# Altium PCB ESC_GEMINI.PcbDoc (part 4 of 4)
Units mm, origin at the board's own origin, x right, y up, seen from the top; angles counter-clockwise.
Board outline 12 x 35 mm, 6 copper layers (F.Cu, In1.Cu, In2.Cu, In3.Cu, In4.Cu, B.Cu); 97 components, 64 nets, 285 pads, 618 vias.
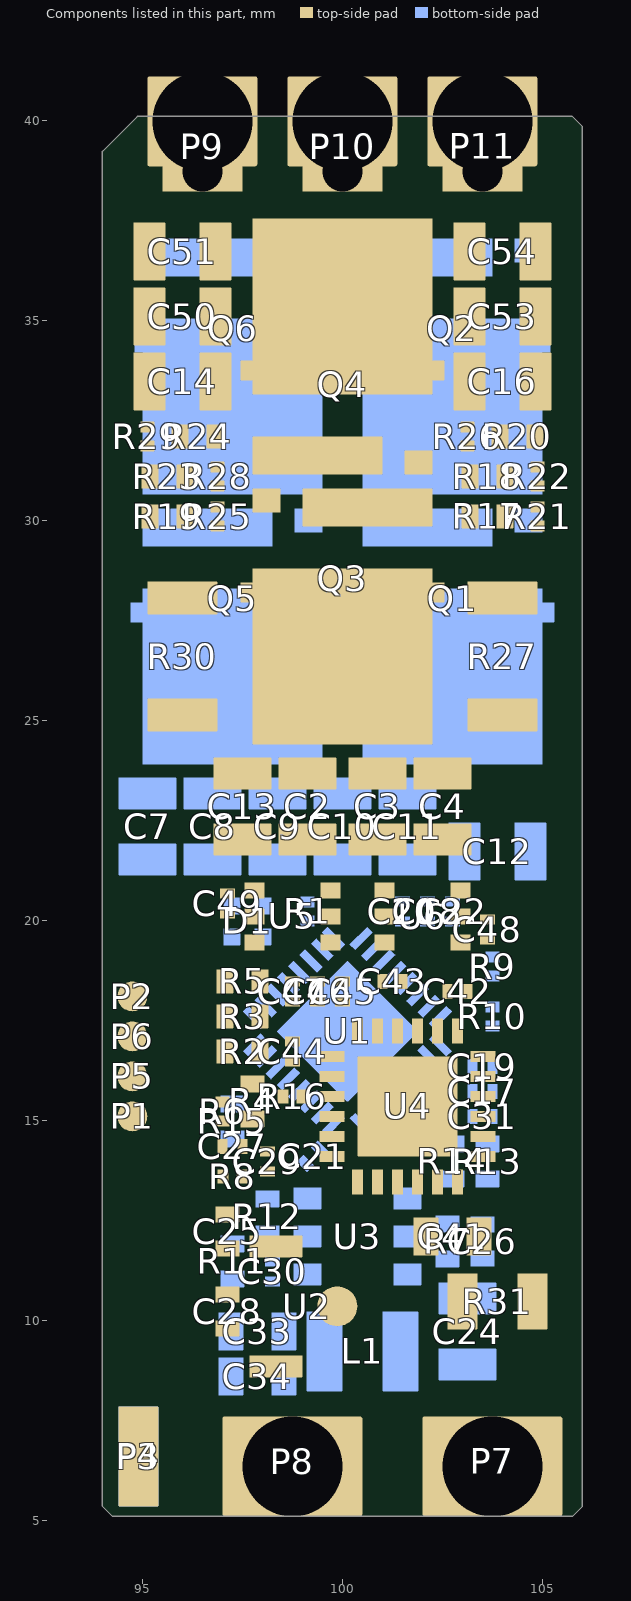
[diagram p8: the components of this part, seen from the top]

## Polygon pours and split planes (outlines as drawn) (continued)
VBUS on In3.Cu "In3.Cu-VBUS" (solid, remove dead copper, pour order 30087): 97.875,22.85 99.625,22.85 99.75,22.975 99.75,25.225 99.625,25.35 98.875,25.35 97.75,24.225 97.75,22.975
PWM_IN-N on In4.Cu "In4.Cu-/CTRL/PWM_IN-N-3" (solid, remove dead copper, pour order 30143): 99.404,16.77 99.301,16.692 99.211,16.667 99.12,16.667 99.016,16.663 98.885,16.627 98.999,16.349 99.212,16.138 99.307,16.249 99.36,16.341 99.398,16.426 99.45,16.517 99.545,16.629
VREF_U on In4.Cu "In4.Cu-/CTRL/VREF_U-3" (solid, remove dead copper, pour order 30277): 103.337,15.454 103.277,15.397 103.229,15.362 103.183,15.338 103.126,15.316 103.048,15.285 103.124,15.099 103.31,15.023 103.341,15.101 103.363,15.158 103.386,15.204 103.422,15.252 103.479,15.312
PWM_IN-N on In4.Cu "In4.Cu-/CTRL/PWM_IN-N-2" (solid, remove dead copper, pour order 30271): 102.6,17 102.683,16.997 102.742,16.989 102.791,16.973 102.847,16.949 102.923,16.915 103.001,17.1 102.923,17.285 102.847,17.251 102.791,17.227 102.742,17.211 102.683,17.203 102.6,17.2
PWM_IN-P on In4.Cu "In4.Cu-/CTRL/PWM_IN-P-1" (solid, remove dead copper, pour order 30153): 98.945,17.075 98.803,17.083 98.703,17.101 98.617,17.124 98.517,17.142 98.375,17.15 98.374,16.85 98.49,16.573 98.608,16.644 98.681,16.724 98.74,16.799 98.817,16.854 98.945,16.875
PHC on In4.Cu "In4.Cu-/CTRL/PHC-1" (solid, remove dead copper, pour order 30163): 103.55,29.975 103.549,29.877 103.544,29.807 103.532,29.747 103.51,29.681 103.473,29.59 103.75,29.474 104.027,29.59 103.99,29.681 103.968,29.747 103.956,29.807 103.951,29.877 103.95,29.975
GND_C on In4.Cu "In4.Cu-/GND_C-1" (solid, remove dead copper, pour order 30077): 103.5,35.35 103.75,35.1 103.75,33.6 104.625,32.725 105.5,32.725 105.75,32.975 105.75,36.6 105.625,36.725 103.75,36.725 103.5,36.475
SWCLK on In4.Cu "In4.Cu-/CTRL/SWCLK-1" (solid, remove dead copper, pour order 30208): 95.245,16.496 95.162,16.592 95.118,16.671 95.094,16.749 95.07,16.842 95.027,16.965 94.749,16.851 94.635,16.573 94.758,16.53 94.851,16.506 94.929,16.482 95.008,16.438 95.104,16.355
+3V3 on In4.Cu "In4.Cu-+3V3-8" (solid, remove dead copper, pour order 30158): 99,20.075 98.994,19.949 98.974,19.862 98.943,19.789 98.901,19.706 98.848,19.59 99.125,19.474 99.402,19.59 99.349,19.706 99.307,19.789 99.276,19.862 99.256,19.949 99.25,20.075
I_SNS_A on In4.Cu "In4.Cu-/CTRL/I_SNS_A-1" (solid, remove dead copper, pour order 30204): 100.37,19.621 100.287,19.717 100.243,19.796 100.219,19.874 100.195,19.967 100.152,20.09 99.874,19.976 99.76,19.698 99.883,19.655 99.976,19.631 100.054,19.607 100.133,19.563 100.229,19.48
SWDIO on In4.Cu "In4.Cu-/CTRL/SWDIO-1" (solid, remove dead copper, pour order 30200): 95.35,15.95 95.223,15.959 95.136,15.984 95.064,16.022 94.982,16.071 94.865,16.127 94.749,15.85 94.865,15.573 94.982,15.629 95.064,15.678 95.136,15.716 95.223,15.741 95.35,15.75
VREF_U on In4.Cu "In4.Cu-/CTRL/VREF_U-2" (solid, remove dead copper, pour order 30292): 103.803,17.762 103.865,17.839 103.889,17.906 103.896,17.972 103.905,18.05 103.935,18.148 103.751,18.226 103.565,18.148 103.604,18.085 103.648,18.036 103.682,17.995 103.692,17.953 103.662,17.903
I_SNS_B on In4.Cu "In4.Cu-/CTRL/I_SNS_B-1" (solid, remove dead copper, pour order 30224): 104.004,18.75 104.127,18.755 104.214,18.768 104.289,18.782 104.377,18.795 104.5,18.8 104.501,19.1 104.288,19.312 104.218,19.212 104.184,19.114 104.156,19.031 104.106,18.972 104.004,18.95
+3V3 on In4.Cu "In4.Cu-+3V3-7" (solid, remove dead copper, pour order 30250): 100.754,20.169 100.819,20.093 100.855,20.031 100.882,19.973 100.918,19.91 100.984,19.834 101.126,19.974 101.266,20.116 101.19,20.182 101.127,20.218 101.069,20.245 101.007,20.281 100.931,20.346
Net-(D1-Anode) on In4.Cu "In4.Cu-Net-(D1-Anode)-1" (solid, remove dead copper, pour order 30302): 96.9,17.827 96.903,17.74 96.909,17.678 96.916,17.624 96.922,17.563 96.925,17.475 97.125,17.474 97.266,17.616 97.213,17.662 97.167,17.693 97.131,17.722 97.108,17.763 97.1,17.827
PWM_IN-N on In4.Cu "In4.Cu-/CTRL/PWM_IN-N-1" (solid, remove dead copper, pour order 30100): 94.5,5.35 95.25,5.35 95.375,5.475 95.375,7.725 95.25,7.85 94.5,7.85 94.375,7.725 94.375,5.475
VBUS_SNS_U on In4.Cu "In4.Cu-/CTRL/VBUS_SNS_U-1" (solid, remove dead copper, pour order 30274): 102.788,15.371 102.848,15.428 102.896,15.464 102.942,15.487 102.999,15.509 103.077,15.54 103.001,15.726 102.815,15.802 102.784,15.724 102.762,15.667 102.739,15.621 102.703,15.573 102.646,15.513
PHC on In4.Cu "In4.Cu-/CTRL/PHC" (solid, remove dead copper, pour order 30122): 102,33.475 101.875,33.6 101.875,39.975 102,40.1 105.5,40.1 105.75,39.85 105.75,37.475 105.5,37.225 104,37.225 103.25,36.475 103.25,35.225 103.5,34.975 103.5,33.6 103.375,33.475
+3V3 on In4.Cu "In4.Cu-+3V3-6" (solid, remove dead copper, pour order 30244): 101.525,20.1 101.425,20.108 101.355,20.126 101.295,20.149 101.225,20.167 101.125,20.175 101.124,19.975 101.125,19.775 101.225,19.783 101.295,19.801 101.355,19.824 101.425,19.842 101.525,19.85
PWM-AP on In4.Cu "In4.Cu-/CTRL/PWM-AP" (solid, remove dead copper, pour order 30173): 98,14.9 98.098,14.899 98.168,14.894 98.228,14.882 98.294,14.86 98.385,14.823 98.501,15.1 98.385,15.377 98.294,15.34 98.228,15.318 98.168,15.306 98.098,15.301 98,15.3
PWM-AN on In4.Cu "In4.Cu-/CTRL/PWM-AN-1" (solid, remove dead copper, pour order 30259): 100.242,13.7 100.309,13.766 100.358,13.81 100.401,13.848 100.449,13.893 100.516,13.959 100.376,14.101 100.19,14.177 100.167,14.092 100.165,14.025 100.166,13.966 100.15,13.908 100.1,13.842
+3V3 on In4.Cu "In4.Cu-+3V3-5" (solid, remove dead copper, pour order 30262): 99.625,13.804 99.636,13.855 99.665,13.88 99.71,13.89 99.765,13.898 99.827,13.915 99.75,14.101 99.565,14.177 99.515,14.084 99.464,14.022 99.419,13.97 99.387,13.904 99.375,13.804
Net-(Q6-Gate) on In4.Cu "In4.Cu-Net-(Q6-Gate)" (solid, remove dead copper, pour order 30168): 97.675,35.6 97.674,35.502 97.669,35.432 97.657,35.372 97.635,35.306 97.598,35.215 97.875,35.099 98.152,35.215 98.115,35.306 98.093,35.372 98.081,35.432 98.076,35.502 98.075,35.6
VREF_U on In4.Cu "In4.Cu-/CTRL/VREF_U-1" (solid, remove dead copper, pour order 30265): 103.35,18.125 103.433,18.122 103.492,18.114 103.541,18.098 103.597,18.074 103.673,18.04 103.751,18.225 103.673,18.41 103.597,18.376 103.541,18.352 103.492,18.336 103.433,18.328 103.35,18.325
+3V3 on In4.Cu "In4.Cu-+3V3-4" (solid, remove dead copper, pour order 30247): 103.379,19.669 103.444,19.593 103.48,19.531 103.507,19.473 103.543,19.41 103.609,19.334 103.751,19.474 103.891,19.616 103.815,19.682 103.752,19.718 103.694,19.745 103.632,19.781 103.556,19.846
BEMF_U on In4.Cu "In4.Cu-/CTRL/BEMF_U-1" (solid, remove dead copper, pour order 30296): 102.704,16.5 102.759,16.488 102.783,16.454 102.791,16.404 102.797,16.342 102.815,16.273 103.001,16.35 103.077,16.535 102.985,16.582 102.923,16.627 102.869,16.664 102.803,16.69 102.704,16.7
VBUS on In4.Cu "In4.Cu-VBUS-1" (solid, remove dead copper, pour order 30086): 21 vertices, not listed, extent 97.625,5.1 105.75,25.475
GND_A on In4.Cu "In4.Cu-/GND_A-1" (solid, remove dead copper, pour order 30069): 94.375,37.6 95.625,37.6 95.875,37.35 95.875,34.6 94.875,33.6 94.5,33.6 94.25,33.85 94.25,37.475
PHB on In4.Cu "In4.Cu-/CTRL/PHB-2" (solid, remove dead copper, pour order 30188): 98.229,17.97 98.133,17.887 98.054,17.843 97.976,17.819 97.883,17.795 97.76,17.752 97.874,17.474 98.152,17.36 98.195,17.483 98.219,17.576 98.243,17.654 98.287,17.733 98.37,17.829
PHA on In4.Cu "In4.Cu-/CTRL/PHA-1" (solid, remove dead copper, pour order 30109): 96.75,32.725 97.5,33.475 97.5,35.85 98.125,36.475 98.125,39.975 98,40.1 95,40.1 94.25,39.35 94.25,37.975 94.5,37.725 95.75,37.725 96.125,37.35 96.125,32.975 96.375,32.725
I_SNS_B on In4.Cu "In4.Cu-/CTRL/I_SNS_B" (solid, remove dead copper, pour order 30294): 103.447,18.813 103.397,18.783 103.355,18.793 103.314,18.827 103.265,18.871 103.202,18.91 103.124,18.724 103.202,18.54 103.3,18.57 103.378,18.579 103.444,18.586 103.511,18.61 103.588,18.672
+3V3 on In4.Cu "In4.Cu-+3V3-3" (solid, remove dead copper, pour order 30128): 96.8,10.45 96.79,10.3 96.765,10.195 96.735,10.105 96.71,10 96.7,9.85 97,9.849 97.3,9.85 97.29,10 97.265,10.105 97.235,10.195 97.21,10.3 97.2,10.45
PWM-BN on In4.Cu "In4.Cu-/CTRL/PWM-BN" (solid, remove dead copper, pour order 30220): 100.609,13.459 100.694,13.375 100.759,13.32 100.822,13.28 100.9,13.244 101.01,13.198 101.126,13.474 101.125,13.775 101.063,13.764 101.016,13.739 100.976,13.717 100.936,13.713 100.891,13.741
Net-(Q5-Gate) on In4.Cu "In4.Cu-Net-(Q5-Gate)" (solid, remove dead copper, pour order 30183): 98.95,30.1 98.951,30.198 98.956,30.268 98.968,30.328 98.99,30.394 99.027,30.485 98.75,30.601 98.473,30.485 98.51,30.394 98.532,30.328 98.544,30.268 98.549,30.198 98.55,30.1
Net-(Q1-Gate) on In4.Cu "In4.Cu-Net-(Q1-Gate)" (solid, remove dead copper, pour order 30138): 104.766,29.584 104.863,29.692 104.916,29.781 104.947,29.867 104.977,29.971 105.027,30.11 104.751,30.226 104.45,30.225 104.466,30.131 104.498,30.058 104.527,29.996 104.529,29.935 104.484,29.866
PHA on In4.Cu "In4.Cu-/CTRL/PHA" (solid, remove dead copper, pour order 30178): 98.075,29.725 98.076,29.823 98.081,29.893 98.093,29.953 98.115,30.019 98.152,30.11 97.875,30.226 97.598,30.11 97.635,30.019 97.657,29.953 97.669,29.893 97.674,29.823 97.675,29.725
SWDIO on In4.Cu "In4.Cu-/CTRL/SWDIO" (solid, remove dead copper, pour order 30280): 97.188,15.871 97.248,15.928 97.296,15.964 97.342,15.987 97.399,16.009 97.477,16.04 97.401,16.226 97.215,16.302 97.184,16.224 97.162,16.167 97.139,16.121 97.103,16.073 97.046,16.013
PWM-BP on In4.Cu "In4.Cu-/CTRL/PWM-BP-1" (solid, remove dead copper, pour order 30286): 98.4,14.575 98.317,14.578 98.258,14.586 98.209,14.602 98.153,14.626 98.077,14.66 97.999,14.475 98.077,14.29 98.153,14.324 98.209,14.348 98.258,14.364 98.317,14.372 98.4,14.375
Net-(D1-Anode) on In4.Cu "In4.Cu-Net-(D1-Anode)" (solid, remove dead copper, pour order 30283): 97.1,19.95 97.103,20.033 97.111,20.092 97.127,20.141 97.151,20.197 97.185,20.273 97,20.351 96.815,20.273 96.849,20.197 96.873,20.141 96.889,20.092 96.897,20.033 96.9,19.95
+3V3 on In4.Cu "In4.Cu-+3V3-2" (solid, remove dead copper, pour order 30241): 98.025,12.85 97.925,12.858 97.855,12.876 97.795,12.899 97.725,12.917 97.625,12.925 97.624,12.725 97.625,12.525 97.725,12.533 97.795,12.551 97.855,12.574 97.925,12.592 98.025,12.6
BEMF_U on In4.Cu "In4.Cu-/CTRL/BEMF_U" (solid, remove dead copper, pour order 30228): 97.275,14.221 97.28,14.098 97.293,14.011 97.307,13.936 97.32,13.848 97.325,13.725 97.625,13.724 97.837,13.937 97.737,14.007 97.639,14.041 97.556,14.069 97.497,14.119 97.475,14.221
PWM-CP on In4.Cu "In4.Cu-/CTRL/PWM-CP-1" (solid, remove dead copper, pour order 30253): 98.304,13.654 98.362,13.593 98.397,13.544 98.42,13.497 98.442,13.439 98.473,13.36 98.751,13.474 98.75,13.775 98.67,13.767 98.608,13.751 98.555,13.742 98.504,13.752 98.446,13.796
PHB on In4.Cu "In4.Cu-/CTRL/PHB-1" (solid, remove dead copper, pour order 30212): 100.679,18.75 100.806,18.739 100.892,18.708 100.962,18.662 101.042,18.608 101.16,18.548 101.275,18.826 101.16,19.103 101.045,19.05 100.963,19.007 100.89,18.976 100.804,18.957 100.679,18.95
PWM-CP on In4.Cu "In4.Cu-/CTRL/PWM-CP" (solid, remove dead copper, pour order 30298): 98.671,13.575 98.616,13.587 98.592,13.621 98.584,13.671 98.578,13.733 98.56,13.802 98.374,13.725 98.298,13.54 98.39,13.493 98.452,13.448 98.506,13.411 98.572,13.385 98.671,13.375
Net-(Q2-Gate) on In4.Cu "In4.Cu-Net-(Q2-Gate)" (solid, remove dead copper, pour order 30235): 104.359,36.709 104.4,36.662 104.423,36.625 104.437,36.588 104.451,36.544 104.473,36.485 104.751,36.599 104.865,36.877 104.806,36.899 104.762,36.913 104.725,36.927 104.688,36.95 104.641,36.991
I_SNS_A on In4.Cu "In4.Cu-/CTRL/I_SNS_A" (solid, remove dead copper, pour order 30256): 102.74,19.325 102.823,19.315 102.877,19.288 102.921,19.25 102.971,19.207 103.048,19.165 103.126,19.35 103.125,19.55 103.029,19.547 102.962,19.541 102.903,19.534 102.836,19.528 102.74,19.525
PWM_IN-N on In4.Cu "In4.Cu-/CTRL/PWM_IN-N" (solid, remove dead copper, pour order 30216): 95.429,7.728 95.509,7.821 95.554,7.897 95.587,7.968 95.632,8.044 95.712,8.138 95.501,8.351 95.2,8.35 95.221,8.233 95.264,8.142 95.303,8.065 95.308,7.99 95.253,7.904
SWCLK on In4.Cu "In4.Cu-/CTRL/SWCLK" (solid, remove dead copper, pour order 30289): 97.178,16.762 97.228,16.792 97.27,16.782 97.311,16.748 97.36,16.704 97.423,16.665 97.501,16.851 97.423,17.035 97.325,17.005 97.247,16.996 97.181,16.989 97.114,16.965 97.037,16.903
+3V3 on In4.Cu "In4.Cu-+3V3-1" (solid, remove dead copper, pour order 30238): 98.025,12.85 97.925,12.858 97.855,12.876 97.795,12.899 97.725,12.917 97.625,12.925 97.624,12.725 97.625,12.525 97.725,12.533 97.795,12.551 97.855,12.574 97.925,12.592 98.025,12.6
+3V3 on In4.Cu "In4.Cu-+3V3" (solid, remove dead copper, pour order 30133): 95.35,15.05 95.2,15.06 95.095,15.085 95.005,15.115 94.9,15.14 94.75,15.15 94.749,14.85 94.75,14.55 94.9,14.56 95.005,14.585 95.095,14.615 95.2,14.64 95.35,14.65
VREF_U on In4.Cu "In4.Cu-/CTRL/VREF_U" (solid, remove dead copper, pour order 30196): 100.1,18.325 99.973,18.334 99.886,18.359 99.814,18.397 99.732,18.446 99.615,18.502 99.499,18.225 99.615,17.948 99.732,18.004 99.814,18.053 99.886,18.091 99.973,18.116 100.1,18.125
PWM-BP on In4.Cu "In4.Cu-/CTRL/PWM-BP" (solid, remove dead copper, pour order 30192): 99.146,14.48 99.242,14.563 99.321,14.607 99.399,14.631 99.492,14.655 99.615,14.698 99.501,14.976 99.223,15.09 99.18,14.967 99.156,14.874 99.132,14.796 99.088,14.717 99.005,14.621
PWM-CN on In4.Cu "In4.Cu-/CTRL/PWM-CN" (solid, remove dead copper, pour order 30232): 101.8,13.725 101.797,13.658 101.788,13.611 101.772,13.571 101.751,13.527 101.723,13.465 102,13.349 102.277,13.465 102.249,13.527 102.228,13.571 102.212,13.611 102.203,13.658 102.2,13.725
VBUS_SNS_U on In4.Cu "In4.Cu-/CTRL/VBUS_SNS_U" (solid, remove dead copper, pour order 30268): 102.525,15.125 102.522,15.042 102.514,14.983 102.498,14.934 102.474,14.878 102.44,14.802 102.625,14.724 102.81,14.802 102.776,14.878 102.752,14.934 102.736,14.983 102.728,15.042 102.725,15.125
PWM_IN-P on In4.Cu "In4.Cu-/CTRL/PWM_IN-P" (solid, remove dead copper, pour order 30300): 102.523,17.5 102.61,17.503 102.672,17.509 102.726,17.516 102.787,17.522 102.875,17.525 102.876,17.725 102.734,17.866 102.688,17.813 102.657,17.767 102.628,17.731 102.587,17.708 102.523,17.7
PWM-AN on In4.Cu "In4.Cu-/CTRL/PWM-AN" (solid, remove dead copper, pour order 30148): 99.9,13.17 99.879,13.042 99.824,12.965 99.749,12.906 99.669,12.833 99.598,12.715 99.875,12.599 100.175,12.6 100.167,12.742 100.149,12.842 100.126,12.928 100.108,13.028 100.1,13.17
GND_C on In4.Cu "In4.Cu-/GND_C" (solid, remove dead copper, pour order 30076): 105.75,35.225 105.75,28.35 105.5,28.1 104,28.1 101.625,30.475 101.625,30.975 101.875,31.225 101.875,33.6 103.75,35.475 105.5,35.475
PHB on In4.Cu "In4.Cu-/CTRL/PHB" (solid, remove dead copper, pour order 30114): 101.625,39.975 101.625,31.35 101.25,30.975 100,30.975 99.75,31.225 99.75,34.6 98.375,35.975 98.375,39.975 98.5,40.1 101.5,40.1
GND_A on In4.Cu "In4.Cu-/GND_A" (solid, remove dead copper, pour order 30068): 94.5,36.225 94.25,35.975 94.25,26.35 94.5,26.1 94.75,26.1 95.625,26.975 95.625,34.35 95.875,34.6 95.875,35.975 95.625,36.225
GND on In4.Cu "In4.Cu-GND" (solid, remove dead copper, pour order 30317): 94.25,5.475 94.5,5.225 105.625,5.225 105.75,5.35 105.75,37.35 105.5,37.6 94.5,37.6 94.25,37.35
VBUS on In4.Cu "In4.Cu-VBUS" (solid, remove dead copper, pour order 30085): 97.875,22.85 99.625,22.85 99.75,22.975 99.75,25.225 99.625,25.35 98.875,25.35 97.75,24.225 97.75,22.975
PHA on B.Cu "B.Cu-/CTRL/PHA-1" (solid, remove dead copper, pour order 30108): 98.25,29.35 98.375,29.475 98.375,30.35 98.625,30.6 99.5,30.6 99.875,30.975 99.875,34.85 99.625,35.1 95,35.1 94.825,34.925 94.825,29.525 95,29.35
Net-(Q6-Gate) on B.Cu "B.Cu-Net-(Q6-Gate)" (solid, remove dead copper, pour order 30132): 98.275,35.725 98.175,35.733 98.105,35.751 98.045,35.774 97.975,35.792 97.875,35.8 97.874,35.6 97.875,35.4 97.975,35.408 98.045,35.426 98.105,35.449 98.175,35.467 98.275,35.475
GND_C on B.Cu "B.Cu-/GND_C-1" (solid, remove dead copper, pour order 30075): 100.125,37.35 100.375,37.6 105.5,37.6 105.75,37.35 105.75,35.475 105.5,35.225 100.5,35.225 100.125,35.6
SWCLK on B.Cu "B.Cu-/CTRL/SWCLK" (solid, remove dead copper, pour order 30223): 97.8,16.98 97.743,16.982 97.702,16.987 97.668,16.997 97.63,17.012 97.577,17.035 97.499,16.85 97.577,16.665 97.632,16.696 97.669,16.727 97.701,16.754 97.74,16.773 97.8,16.78
Net-(U3-SW) on B.Cu "B.Cu-Net-(U3-SW)" (solid, remove dead copper, pour order 30107): 101.25,11.35 101.25,10.725 101,10.475 101,8.35 101.125,8.225 101.75,8.225 101.875,8.35 101.875,10.225 102,10.35 102,11.35 101.875,11.475 101.375,11.475
BEMF_U on B.Cu "B.Cu-/CTRL/BEMF_U-1" (solid, remove dead copper, pour order 30227): 103.25,16.45 103.203,16.455 103.173,16.469 103.148,16.489 103.12,16.512 103.077,16.535 102.999,16.35 103.077,16.165 103.12,16.188 103.148,16.211 103.173,16.231 103.203,16.245 103.25,16.25
GND_C on B.Cu "B.Cu-/GND_C" (solid, remove dead copper, pour order 30074): 105.75,35.475 105.75,29.35 105.5,29.1 105.25,29.1 105.125,29.225 105.125,29.475 105.375,29.725 105.375,35.1 105.125,35.35 105.375,35.6 105.625,35.6
PWM-BN on B.Cu "B.Cu-/CTRL/PWM-BN" (solid, remove dead copper, pour order 30207): 101.102,13.825 101.015,13.822 100.953,13.816 100.899,13.809 100.838,13.803 100.75,13.8 100.749,13.6 100.891,13.459 100.937,13.512 100.968,13.558 100.997,13.594 101.038,13.617 101.102,13.625
PWM-CN on B.Cu "B.Cu-/CTRL/PWM-CN" (solid, remove dead copper, pour order 30199): 102.025,14.077 102.017,14.013 101.994,13.972 101.958,13.943 101.912,13.912 101.859,13.866 102,13.724 102.2,13.725 102.203,13.813 102.209,13.874 102.216,13.928 102.222,13.99 102.225,14.077
PWM_IN-P on B.Cu "B.Cu-/CTRL/PWM_IN-P" (solid, remove dead copper, pour order 30147): 102.584,17.562 102.64,17.598 102.689,17.594 102.739,17.568 102.798,17.539 102.875,17.525 102.876,17.726 102.798,17.91 102.702,17.872 102.633,17.845 102.576,17.817 102.517,17.774 102.442,17.704
+3V3 on B.Cu "B.Cu-+3V3-3" (solid, remove dead copper, pour order 30187): 103.85,19.088 103.853,19.167 103.862,19.224 103.878,19.271 103.902,19.324 103.935,19.398 103.75,19.476 103.565,19.398 103.598,19.324 103.622,19.271 103.638,19.224 103.647,19.167 103.65,19.088
+3V3 on B.Cu "B.Cu-+3V3-2" (solid, remove dead copper, pour order 30157): 103.396,19.687 103.453,19.627 103.489,19.579 103.512,19.533 103.534,19.476 103.565,19.398 103.751,19.474 103.827,19.66 103.749,19.691 103.692,19.713 103.646,19.737 103.598,19.772 103.538,19.829
VBUS on B.Cu "B.Cu-VBUS-3" (solid, remove dead copper, pour order 30102): 101.25,11.85 101.375,11.725 101.875,11.725 102.375,11.225 104.25,11.225 104.375,11.35 104.375,11.725 104.25,11.85 102.5,11.85 101.875,12.475 101.375,12.475 101.25,12.35
GND_A on B.Cu "B.Cu-/GND_A-1" (solid, remove dead copper, pour order 30067): 94.875,35.35 94.625,35.1 94.625,29.475 94.875,29.225 94.875,28.975 94.75,28.85 94.375,28.85 94.25,28.975 94.25,35.475 94.375,35.6 94.625,35.6
VBUS_SNS_U on B.Cu "B.Cu-/CTRL/VBUS_SNS_U" (solid, remove dead copper, pour order 30191): 102.79,14.538 102.757,14.548 102.761,14.576 102.785,14.618 102.812,14.669 102.825,14.725 102.624,14.725 102.484,14.584 102.553,14.495 102.595,14.414 102.633,14.348 102.691,14.304 102.79,14.287
PWM-BP on B.Cu "B.Cu-/CTRL/PWM-BP" (solid, remove dead copper, pour order 30219): 98.278,14.67 98.224,14.633 98.177,14.63 98.129,14.645 98.073,14.665 98,14.675 97.999,14.474 98.141,14.334 98.205,14.388 98.256,14.42 98.304,14.443 98.356,14.474 98.419,14.529
PWM_IN-N on B.Cu "B.Cu-/CTRL/PWM_IN-N" (solid, remove dead copper, pour order 30172): 102.691,16.98 102.737,17.011 102.778,17.008 102.818,16.983 102.865,16.948 102.923,16.915 103.001,17.101 102.923,17.285 102.826,17.252 102.752,17.235 102.689,17.219 102.626,17.187 102.55,17.122
Net-(Q5-Gate) on B.Cu "B.Cu-Net-(Q5-Gate)" (solid, remove dead copper, pour order 30137): 99.119,30.125 99.039,30.135 98.988,30.163 98.948,30.201 98.9,30.244 98.827,30.285 98.749,30.1 98.75,29.9 98.842,29.897 98.907,29.891 98.963,29.884 99.027,29.878 99.119,29.875
VBUS on B.Cu "B.Cu-VBUS-2" (solid, remove dead copper, pour order 30084): 23 vertices, not listed, extent 101.75,5.1 105.75,21.1
I_SNS_A on B.Cu "B.Cu-/CTRL/I_SNS_A" (solid, remove dead copper, pour order 30215): 102.857,19.125 102.908,19.164 102.954,19.175 103,19.169 103.055,19.157 103.125,19.15 103.126,19.351 102.984,19.491 102.92,19.432 102.871,19.394 102.828,19.363 102.779,19.325 102.715,19.266
+6V on B.Cu "B.Cu-+6V" (solid, remove dead copper, pour order 30106): 99.875,10.225 100,10.1 100,8.225 99.875,8.1 98.25,8.1 97.875,8.475 97.875,9.975 98.125,10.225
+3V3 on B.Cu "B.Cu-+3V3-1" (solid, remove dead copper, pour order 30182): 99.327,14.29 99.341,14.187 99.382,14.124 99.443,14.079 99.52,14.031 99.609,13.959 99.75,14.099 99.75,14.3 99.684,14.288 99.623,14.264 99.573,14.245 99.539,14.248 99.527,14.29
PWM-AP on B.Cu "B.Cu-/CTRL/PWM-AP" (solid, remove dead copper, pour order 30152): 98.295,15.254 98.238,15.218 98.189,15.224 98.138,15.253 98.078,15.285 98,15.3 97.999,15.099 98.077,14.915 98.173,14.952 98.243,14.977 98.302,15.003 98.361,15.043 98.436,15.112
PWM-CP on B.Cu "B.Cu-/CTRL/PWM-CP" (solid, remove dead copper, pour order 30167): 98.35,14.177 98.285,14.101 98.254,14.037 98.239,13.974 98.223,13.899 98.19,13.802 98.374,13.724 98.56,13.802 98.526,13.861 98.491,13.908 98.465,13.948 98.461,13.989 98.491,14.035
GND_A on B.Cu "B.Cu-/GND_A" (solid, remove dead copper, pour order 30066): 97.75,35.975 97,35.225 94.5,35.225 94.25,35.475 94.25,37.475 94.375,37.6 98.125,37.6 98.375,37.35 98.375,36.225 98.125,35.975
SWDIO on B.Cu "B.Cu-/CTRL/SWDIO" (solid, remove dead copper, pour order 30177): 97.703,16.359 97.658,16.328 97.619,16.328 97.579,16.349 97.533,16.38 97.477,16.41 97.399,16.224 97.477,16.04 97.573,16.075 97.646,16.095 97.707,16.115 97.769,16.151 97.845,16.217
VREF_U on B.Cu "B.Cu-/CTRL/VREF_U" (solid, remove dead copper, pour order 30203): 102.773,15.125 102.837,15.117 102.878,15.094 102.907,15.058 102.938,15.012 102.984,14.959 103.126,15.1 103.125,15.3 103.037,15.303 102.976,15.309 102.922,15.316 102.86,15.322 102.773,15.325
BEMF_U on B.Cu "B.Cu-/CTRL/BEMF_U" (solid, remove dead copper, pour order 30195): 102.648,16.125 102.735,16.128 102.797,16.134 102.851,16.141 102.912,16.147 103,16.15 103.001,16.35 102.859,16.491 102.813,16.438 102.782,16.392 102.753,16.356 102.712,16.333 102.648,16.325
+3V3 on B.Cu "B.Cu-+3V3" (solid, remove dead copper, pour order 30127): 97.125,13.5 97.117,13.4 97.099,13.33 97.076,13.27 97.058,13.2 97.05,13.1 97.25,13.099 97.45,13.1 97.442,13.2 97.424,13.27 97.401,13.33 97.383,13.4 97.375,13.5
PWM-AN on B.Cu "B.Cu-/CTRL/PWM-AN" (solid, remove dead copper, pour order 30211): 100.727,14.325 100.64,14.322 100.578,14.316 100.524,14.309 100.463,14.303 100.375,14.3 100.374,14.1 100.516,13.959 100.562,14.012 100.593,14.058 100.622,14.094 100.663,14.117 100.727,14.125
I_SNS_B on B.Cu "B.Cu-/CTRL/I_SNS_B" (solid, remove dead copper, pour order 30142): 102.879,18.423 102.944,18.475 102.999,18.498 103.054,18.506 103.119,18.514 103.202,18.54 103.126,18.726 102.984,18.866 102.918,18.795 102.877,18.74 102.844,18.69 102.802,18.635 102.737,18.564
Net-(D1-Anode) on B.Cu "B.Cu-Net-(D1-Anode)-1" (solid, remove dead copper, pour order 30162): 96.975,17.179 96.987,17.234 97.021,17.258 97.071,17.266 97.133,17.272 97.202,17.29 97.125,17.476 96.94,17.552 96.893,17.46 96.848,17.398 96.811,17.344 96.785,17.278 96.775,17.179
VBUS on B.Cu "B.Cu-VBUS-1" (solid, remove dead copper, pour order 30083): 94.25,22.85 94.375,22.725 103.5,22.725 103.75,22.475 103.75,21.1 104,20.85 105.5,20.85 105.75,21.1 105.75,28.35 105.5,28.6 94.5,28.6 94.25,28.35
PHC on B.Cu "B.Cu-/CTRL/PHC-1" (solid, remove dead copper, pour order 30121): 103.875,29.35 104,29.475 104,30.35 104.25,30.6 105,30.6 105.175,30.775 105.175,34.925 105,35.1 100.375,35.1 100.125,34.85 100.125,29.6 100.375,29.35
Net-(D1-Anode) on B.Cu "B.Cu-Net-(D1-Anode)" (solid, remove dead copper, pour order 30231): 97.237,20.463 97.195,20.467 97.166,20.478 97.143,20.495 97.116,20.514 97.077,20.535 96.999,20.35 97.077,20.165 97.118,20.189 97.144,20.215 97.165,20.239 97.193,20.256 97.237,20.263
GND on B.Cu "B.Cu-GND" (solid, remove dead copper, pour order 30318): 94.25,5.475 94.5,5.225 105.625,5.225 105.75,5.35 105.75,37.35 105.5,37.6 94.5,37.6 94.25,37.35
PHC on B.Cu "B.Cu-/CTRL/PHC" (solid, remove dead copper, pour order 30120): 105.5,37.85 105.75,38.1 105.75,39.35 105,40.1 102,40.1 101.875,39.975 101.875,38.1 102.125,37.85
PHA on B.Cu "B.Cu-/CTRL/PHA" (solid, remove dead copper, pour order 30105): 94.5,37.85 94.25,38.1 94.25,39.35 95,40.1 98,40.1 98.125,39.975 98.125,38.1 97.875,37.85
VBUS on B.Cu "B.Cu-VBUS" (solid, remove dead copper, pour order 30082): 97.875,22.85 99.625,22.85 99.75,22.975 99.75,25.225 99.625,25.35 98.875,25.35 97.75,24.225 97.75,22.975

## Keep-outs
F.Cu:
  region: 98.625,20.35 98.625,19.85 98.375,19.6 96.875,19.6 96.5,19.975 96.5,20.225 96.75,20.475 98.5,20.475
  region: 104.75,20.225 104.75,19.975 104.5,19.725 102.625,19.725 102.5,19.85 102.5,20.35 103,20.85 104.125,20.85
  region: 102,19.6 101.25,19.6 101.25,19.725 101.75,19.725 102,19.975
  region: 96.999,20.48 97.11,20.424 97.199,20.335 97.255,20.224 97.275,20.1 97.255,19.976 97.199,19.865 97.11,19.776 96.999,19.72 96.875,19.7 96.751,19.72 96.64,19.776 96.551,19.865 96.495,19.976 96.475,20.1 96.495,20.224 96.551,20.335 96.64,20.424 96.751,20.48 96.875,20.5
  region: 100.5,17.725 100.375,17.725 100.375,18.1 100.25,18.225 100.5,18.225
  region: 104.124,20.73 104.235,20.674 104.324,20.585 104.38,20.474 104.4,20.35 104.38,20.226 104.324,20.115 104.235,20.026 104.124,19.97 104,19.95 103.876,19.97 103.765,20.026 103.676,20.115 103.62,20.226 103.6,20.35 103.62,20.474 103.676,20.585 103.765,20.674 103.876,20.73 104,20.75
In1.Cu:
  region: 104,26.725 104,26.225 103.875,26.1 103.875,22.35 104.375,21.85 104.375,20.1 104.125,19.85 103.875,19.85 103.625,20.1 103.625,21.6 103.125,22.1 103.125,26.6 103.375,26.85 103.875,26.85
  region: 99.75,31.1 99.75,29.225 99.625,29.1 99.5,29.1 99,29.6 99,30.6 99.625,31.225
  region: 96.75,20.1 96.875,19.975 97.11,19.776 96.999,19.72 96.875,19.7 96.751,19.72 96.64,19.776 96.551,19.865 96.495,19.976 96.475,20.1 96.495,20.224 96.551,20.335 96.64,20.424
  region: 97.625,25.725 97.625,20.225 97.125,19.725 96.75,19.725 96.5,19.975 96.5,20.425 97,20.925 97,25.1 96,26.1 96,26.475 96.25,26.725 96.625,26.725
In2.Cu:
  region: 101.875,13.475 101.75,13.225 101.25,13.35 101.375,13.6
  region: 104.75,15.35 104.625,14.85 104.375,14.975 104.5,15.475
In3.Cu:
  region: 101.875,13.475 101.75,13.225 101.25,13.35 101.375,13.6
  region: 104.75,15.35 104.625,14.85 104.375,14.975 104.5,15.475
Edge.Cuts:
  lines w0: 94,5.35 94,39.225 94.875,40.1 105.75,40.1 106,39.85 106,5.35 105.75,5.1 94.25,5.1 94,5.35
  lines w0.254: 94.25,5.1 94,5.35 94,39.225 94.875,40.1 105.75,40.1 106,39.85 106,5.35 105.75,5.1

## Silkscreen, mask and mechanical layers (free items; w line width, h text height)
F.SilkS:
  text "A" at 93.969,38.2 h1
  text "VIN" at 102.842,7.7 h1
B.SilkS:
  text "A" at 95.031,38.2 h1
  text "ESC_GEMINI" at 96.658,20.471 h0.8 r90
  text "v1.0(230823)" at 95.457,20.136 h0.6 r90
  text "VIN" at 104.1,8.067 h1 r270
B.Mask:
  lines w0.254: 96.5,9.35 94.5,9.35 94.5,10.475 96.5,11.225 94.5,12.35 96.5,12.475 94.5,13.975 96.5,13.975
Dwgs.User:
  lines w0.254: 94,20.725 106,20.725 ; 96.675,20.1 97.075,20.1 ; 96.875,19.9 96.875,20.3 ; 103.8,20.35 104.2,20.35 ; 103.859,20.209 104.141,20.491 ; 103.859,20.491 104.141,20.209 ; 104,20.15 104,20.55 ; 96.625,7.6 104.125,7.6 104.125,20.725 96.625,20.725 96.625,7.6
F.Fab:
  lines w0.254: 94,5.1 106,5.1 106,40.1 94,40.1 94,5.1

## Dimensions
100,40.225 to 96.5,40.225 on Dwgs.User
103.5,40.225 to 100,40.225 on Dwgs.User
94,5.1 to 94,40.1 on Dwgs.User
98.75,5.1 to 94.9,5.1 on Dwgs.User
103.75,5.1 to 98.75,5.1 on Dwgs.User
94,5.1 to 106,5.1 on Dwgs.User